# Altium PCB small_matrix_ws2812_LEDs.PcbDoc (part 2 of 2)
Units mm, origin at the board's own origin, x right, y up, seen from the top; angles counter-clockwise.
Board outline 51.05 x 59.31 mm, 2 copper layers (Top Layer, Bottom Layer); 129 components, 63 nets, 389 pads, 120 vias.
Unrouted connection lines stored in the file: 10.
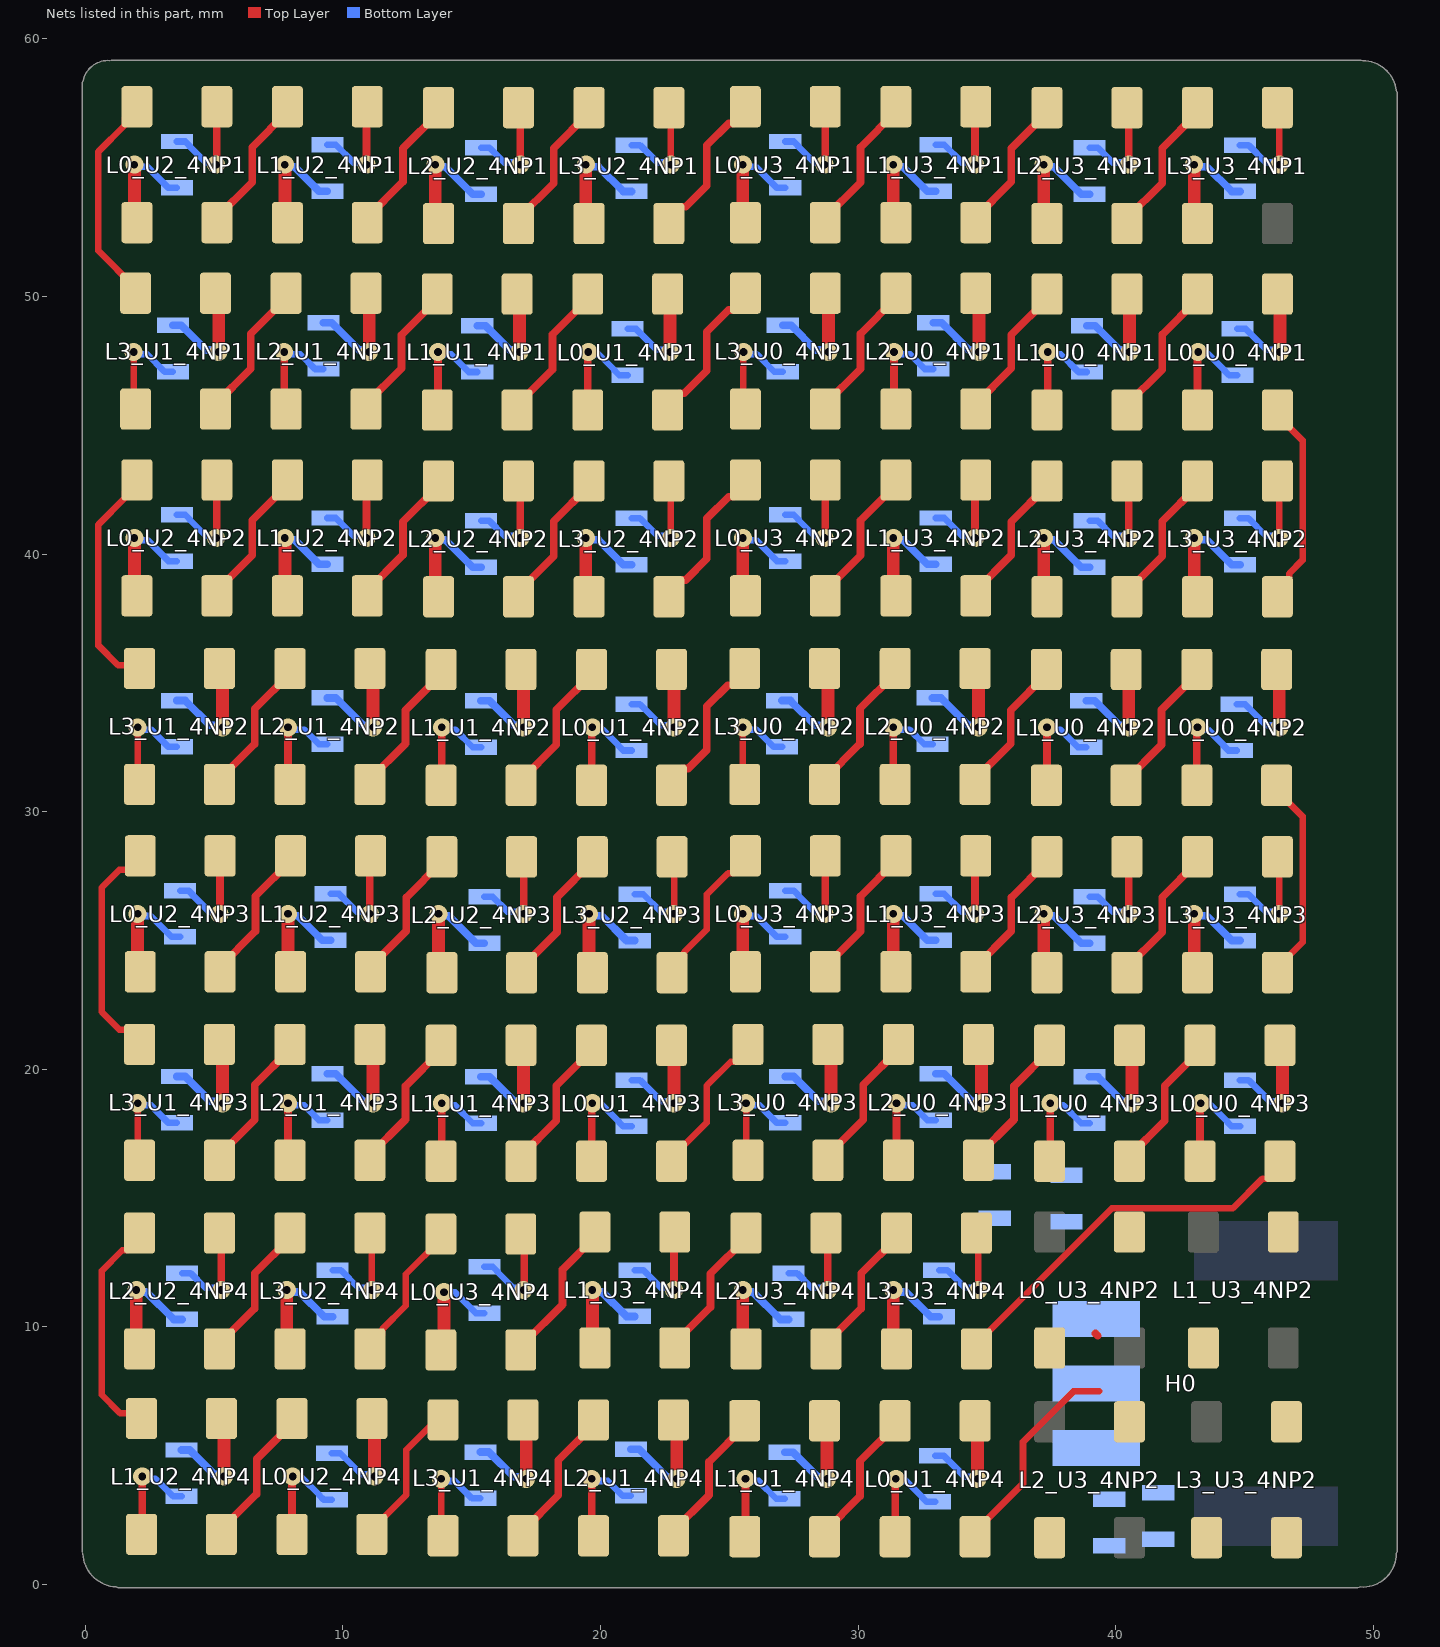
[diagram p2: the nets of this part, all layers, seen from the top]

## Via types
v1: diameter 0.7, hole 0.3, Top Layer to Bottom Layer, 120 vias

## Nets (pads, with @x,y where several pads share a name; then routed paths per layer and width w, separated by ;. In a path a pad name is that pad's centre, name@x,y a point inside that pad or via, vN(x,y) a via of type N, cw(c..) or ccw(c..) an arc to the next point about the centre after c; other vN are vias at no path point)
+5: C1_U0_4NP1.2 C1_U0_4NP2.2 C1_U0_4NP3.2 C1_U1_4NP1.2 C1_U1_4NP2.2 C1_U1_4NP3.2 C1_U1_4NP4.2 C1_U2_4NP1.2 C1_U2_4NP2.2 C1_U2_4NP3.2 C1_U2_4NP4.2 C1_U3_4NP1.2 C1_U3_4NP2.2 C1_U3_4NP3.2 C1_U3_4NP4.2 C2_U0_4NP1.2 C2_U0_4NP2.2 C2_U0_4NP3.2 C2_U1_4NP1.2 C2_U1_4NP2.2 C2_U1_4NP3.2 C2_U1_4NP4.2 C2_U2_4NP1.2 C2_U2_4NP2.2 C2_U2_4NP3.2 C2_U2_4NP4.2 C2_U3_4NP1.2 C2_U3_4NP2.2 C2_U3_4NP3.2 C2_U3_4NP4.2 C3_U0_4NP1.2 C3_U0_4NP2.2 C3_U0_4NP3.2 C3_U1_4NP1.2 C3_U1_4NP2.2 C3_U1_4NP3.2 C3_U1_4NP4.2 C3_U2_4NP1.2 C3_U2_4NP2.2 C3_U2_4NP3.2 C3_U2_4NP4.2 C3_U3_4NP1.2 C3_U3_4NP2.2 C3_U3_4NP3.2 C3_U3_4NP4.2 C4_U0_4NP1.2 C4_U0_4NP2.2 C4_U0_4NP3.2 C4_U1_4NP1.2 C4_U1_4NP2.2 C4_U1_4NP3.2 C4_U1_4NP4.2 C4_U2_4NP1.2 C4_U2_4NP2.2 C4_U2_4NP3.2 C4_U2_4NP4.2 C4_U3_4NP1.2 C4_U3_4NP2.2 C4_U3_4NP3.2 C4_U3_4NP4.2 H0.3 L0_U0_4NP1.1 L0_U0_4NP2.1 L0_U0_4NP3.1 L0_U1_4NP1.1 L0_U1_4NP2.1 L0_U1_4NP3.1 L0_U1_4NP4.1 L0_U2_4NP1.1 L0_U2_4NP2.1 L0_U2_4NP3.1 L0_U2_4NP4.1 L0_U3_4NP1.1 L0_U3_4NP2.1 L0_U3_4NP3.1 L0_U3_4NP4.1 L1_U0_4NP1.1 L1_U0_4NP2.1 L1_U0_4NP3.1 L1_U1_4NP1.1 L1_U1_4NP2.1 L1_U1_4NP3.1 L1_U1_4NP4.1 L1_U2_4NP1.1 L1_U2_4NP2.1 L1_U2_4NP3.1 L1_U2_4NP4.1 L1_U3_4NP1.1 L1_U3_4NP2.1 L1_U3_4NP3.1 L1_U3_4NP4.1 L2_U0_4NP1.1 L2_U0_4NP2.1 L2_U0_4NP3.1 L2_U1_4NP1.1 L2_U1_4NP2.1 L2_U1_4NP3.1 L2_U1_4NP4.1 L2_U2_4NP1.1 L2_U2_4NP2.1 L2_U2_4NP3.1 L2_U2_4NP4.1 L2_U3_4NP1.1 L2_U3_4NP2.1 L2_U3_4NP3.1 L2_U3_4NP4.1 L3_U0_4NP1.1 L3_U0_4NP2.1 L3_U0_4NP3.1 L3_U1_4NP1.1 L3_U1_4NP2.1 L3_U1_4NP3.1 L3_U1_4NP4.1 L3_U2_4NP1.1 L3_U2_4NP2.1 L3_U2_4NP3.1 L3_U2_4NP4.1 L3_U3_4NP1.1 L3_U3_4NP2.1 L3_U3_4NP3.1 L3_U3_4NP4.1 | length 266.9
  Top Layer w0.254: L0_U2_4NP2.1@1.905,38.48 L0_U2_4NP2.1@2.006,38.379 ; L0_U2_4NP1.1@1.905,52.969 L0_U2_4NP1.1@2.006,52.868 ; L2_U2_4NP4.1@1.98,9.271 L2_U2_4NP4.1@2.107,9.144 ; L0_U2_4NP3.1@2.032,23.886 L0_U2_4NP3.1@2.133,23.785 ; L3_U1_4NP1.1@5.054,50.129 L3_U1_4NP1.1@5.181,50.002 ; L3_U1_4NP3.1@5.207,20.966 L3_U1_4NP3.1@5.334,20.839 ; L3_U1_4NP2.1@5.207,35.56 L3_U1_4NP2.1@5.334,35.433 ; L1_U2_4NP4.1@5.285,6.441 L1_U2_4NP4.1@5.386,6.34 ; L1_U2_4NP2.1@7.747,38.48 L1_U2_4NP2.1@7.848,38.379 ; L1_U2_4NP1.1@7.747,52.969 L1_U2_4NP1.1@7.848,52.868 ; L3_U2_4NP4.1@7.822,9.271 L3_U2_4NP4.1@7.949,9.144 ; L1_U2_4NP3.1@7.874,23.886 L1_U2_4NP3.1@7.975,23.785 ; L2_U1_4NP1.1@10.896,50.129 L2_U1_4NP1.1@11.023,50.002 ; L2_U1_4NP3.1@11.049,20.966 L2_U1_4NP3.1@11.176,20.839 ; L2_U1_4NP2.1@11.049,35.56 L2_U1_4NP2.1@11.176,35.433 ; L0_U2_4NP4.1@11.127,6.441 L0_U2_4NP4.1@11.228,6.34 ; L2_U2_4NP2.1@13.589,38.47 L2_U2_4NP2.1@13.716,38.343 ; L2_U2_4NP1.1@13.589,52.959 L2_U2_4NP1.1@13.716,52.832 ; L2_U2_4NP3.1@13.716,23.876 L2_U2_4NP3.1@13.843,23.749 ; L1_U1_4NP1.1@16.764,50.093 L1_U1_4NP1.1@16.865,49.992 ; L1_U1_4NP3.1@16.917,20.93 L1_U1_4NP3.1@17.018,20.829 ; L1_U1_4NP2.1@16.917,35.524 L1_U1_4NP2.1@17.018,35.423 ; L3_U1_4NP4.1@16.992,6.386 L3_U1_4NP4.1@17.119,6.259 ; L3_U2_4NP2.1@19.431,38.47 L3_U2_4NP2.1@19.558,38.343 ; L3_U2_4NP1.1@19.431,52.959 L3_U2_4NP1.1@19.558,52.832 ; L3_U2_4NP3.1@19.558,23.876 L3_U2_4NP3.1@19.685,23.749 ; L1_U3_4NP4.1@19.685,9.281 L1_U3_4NP4.1@19.786,9.18 ; L0_U1_4NP1.1@22.606,50.093 L0_U1_4NP1.1@22.707,49.992 ; L0_U1_4NP3.1@22.759,20.93 L0_U1_4NP3.1@22.86,20.829 ; L0_U1_4NP2.1@22.759,35.524 L0_U1_4NP2.1@22.86,35.423 ; L2_U1_4NP4.1@22.834,6.386 L2_U1_4NP4.1@22.961,6.259 ; L2_U3_4NP4.1@25.527,9.271 L2_U3_4NP4.1@25.654,9.144 ; L0_U3_4NP3.1@25.527,23.886 L0_U3_4NP3.1@25.628,23.785 ; L0_U3_4NP2.1@25.527,38.48 L0_U3_4NP2.1@25.628,38.379 ; L0_U3_4NP1.1@25.527,52.969 L0_U3_4NP1.1@25.628,52.868 ; L1_U1_4NP4.1@28.702,6.35 L1_U1_4NP4.1@28.803,6.249 ; L3_U0_4NP2.1@28.702,35.56 L3_U0_4NP2.1@28.829,35.433 ; L3_U0_4NP1.1@28.728,50.129 L3_U0_4NP1.1@28.855,50.002 ; L3_U0_4NP3.1@28.829,20.966 L3_U0_4NP3.1@28.956,20.839 ; L3_U3_4NP4.1@31.369,9.271 L3_U3_4NP4.1@31.496,9.144 ; L1_U3_4NP3.1@31.369,23.886 L1_U3_4NP3.1@31.47,23.785 ; L1_U3_4NP2.1@31.369,38.48 L1_U3_4NP2.1@31.47,38.379 ; L1_U3_4NP1.1@31.369,52.969 L1_U3_4NP1.1@31.47,52.868 ; L0_U1_4NP4.1@34.544,6.35 L0_U1_4NP4.1@34.645,6.249 ; L2_U0_4NP2.1@34.544,35.56 L2_U0_4NP2.1@34.671,35.433 ; L2_U0_4NP1.1@34.57,50.129 L2_U0_4NP1.1@34.697,50.002 ; L2_U0_4NP3.1@34.671,20.966 L2_U0_4NP3.1@34.798,20.839 ; L2_U3_4NP3.1@37.211,23.876 L2_U3_4NP3.1@37.338,23.749 ; L2_U3_4NP2.1@37.211,38.47 L2_U3_4NP2.1@37.338,38.343 ; L2_U3_4NP1.1@37.211,52.959 L2_U3_4NP1.1@37.338,52.832 ; L1_U0_4NP2.1@40.412,35.524 L1_U0_4NP2.1@40.513,35.423 ; L1_U0_4NP1.1@40.438,50.093 L1_U0_4NP1.1@40.539,49.992 ; L1_U0_4NP3.1@40.539,20.93 L1_U0_4NP3.1@40.64,20.829 ; L3_U3_4NP3.1@43.053,23.876 L3_U3_4NP3.1@43.18,23.749 ; L3_U3_4NP2.1@43.053,38.47 L3_U3_4NP2.1@43.18,38.343 ; L3_U3_4NP1.1@43.053,52.959 L3_U3_4NP1.1@43.18,52.832 ; L0_U0_4NP2.1@46.254,35.524 L0_U0_4NP2.1@46.355,35.423 ; L0_U0_4NP1.1@46.28,50.093 L0_U0_4NP1.1@46.381,49.992 ; L0_U0_4NP3.1@46.381,20.93 L0_U0_4NP3.1@46.482,20.829
  Top Layer w0.3: 39.217,9.739 39.304,9.652
  Top Layer w0.5: L0_U2_4NP2.1@1.905,38.48 v1(1.905,40.629) ; L0_U2_4NP1.1@1.905,52.969 v1(1.905,55.118) ; L2_U2_4NP4.1@1.98,9.271 v1(1.98,11.43) ; L0_U2_4NP3.1@2.032,23.886 v1(2.032,26.035) ; v1(5.181,47.843) L3_U1_4NP1.1@5.181,50.002 ; v1(5.334,18.68) L3_U1_4NP3.1@5.334,20.839 ; v1(5.334,33.274) L3_U1_4NP2.1@5.334,35.433 ; v1(5.386,4.191) L1_U2_4NP4.1@5.386,6.34 ; L1_U2_4NP2.1@7.747,38.48 v1(7.747,40.629) ; L1_U2_4NP1.1@7.747,52.969 v1(7.747,55.118) ; L3_U2_4NP4.1@7.822,9.271 v1(7.822,11.43) ; L1_U2_4NP3.1@7.874,23.886 v1(7.874,26.035) ; v1(11.023,47.843) L2_U1_4NP1.1@11.023,50.002 ; v1(11.176,18.68) L2_U1_4NP3.1@11.176,20.839 ; v1(11.176,33.274) L2_U1_4NP2.1@11.176,35.433 ; v1(11.228,4.191) L0_U2_4NP4.1@11.228,6.34 ; L2_U2_4NP2.1@13.589,38.47 v1(13.589,40.629) ; L2_U2_4NP1.1@13.589,52.959 v1(13.589,55.118) ; L2_U2_4NP3.1@13.716,23.876 v1(13.716,26.035) ; L0_U3_4NP4.1@13.928,9.5 v1(13.928,11.345) ; v1(16.865,47.843) L1_U1_4NP1.1@16.865,49.992 ; v1(17.018,18.68) L1_U1_4NP3.1@17.018,20.829 ; v1(17.018,33.274) L1_U1_4NP2.1@17.018,35.423 ; v1(17.119,4.1) L3_U1_4NP4.1@17.119,6.259 ; L3_U2_4NP2.1@19.431,38.47 v1(19.431,40.629) ; L3_U2_4NP1.1@19.431,52.959 v1(19.431,55.118) ; L3_U2_4NP3.1@19.558,23.876 v1(19.558,26.035) ; L1_U3_4NP4.1@19.685,9.281 v1(19.685,11.43) ; v1(22.707,47.843) L0_U1_4NP1.1@22.707,49.992 ; v1(22.86,18.68) L0_U1_4NP3.1@22.86,20.829 ; v1(22.86,33.274) L0_U1_4NP2.1@22.86,35.423 ; v1(22.961,4.1) L2_U1_4NP4.1@22.961,6.259 ; L2_U3_4NP4.1@25.527,9.271 v1(25.527,11.43) ; L0_U3_4NP3.1@25.527,23.886 v1(25.527,26.035) ; L0_U3_4NP2.1@25.527,38.48 v1(25.527,40.629) ; L0_U3_4NP1.1@25.527,52.969 v1(25.527,55.118) ; v1(28.803,4.1) L1_U1_4NP4.1@28.803,6.249 ; v1(28.829,33.274) L3_U0_4NP2.1@28.829,35.433 ; v1(28.855,47.843) L3_U0_4NP1.1@28.855,50.002 ; v1(28.956,18.68) L3_U0_4NP3.1@28.956,20.839 ; L3_U3_4NP4.1@31.369,9.271 v1(31.369,11.43) ; L1_U3_4NP3.1@31.369,23.886 v1(31.369,26.035) ; L1_U3_4NP2.1@31.369,38.48 v1(31.369,40.629) ; L1_U3_4NP1.1@31.369,52.969 v1(31.369,55.118) ; v1(34.645,4.1) L0_U1_4NP4.1@34.645,6.249 ; v1(34.671,33.274) L2_U0_4NP2.1@34.671,35.433 ; v1(34.697,47.843) L2_U0_4NP1.1@34.697,50.002 ; v1(34.798,18.68) L2_U0_4NP3.1@34.798,20.839 ; L2_U3_4NP3.1@37.211,23.876 v1(37.211,26.035) ; L2_U3_4NP2.1@37.211,38.47 v1(37.211,40.629) ; L2_U3_4NP1.1@37.211,52.959 v1(37.211,55.118) ; v1(40.513,33.274) L1_U0_4NP2.1@40.513,35.423 ; v1(40.539,47.843) L1_U0_4NP1.1@40.539,49.992 ; v1(40.64,18.68) L1_U0_4NP3.1@40.64,20.829 ; L3_U3_4NP3.1@43.053,23.876 v1(43.053,26.035) ; L3_U3_4NP2.1@43.053,38.47 v1(43.053,40.629) ; L3_U3_4NP1.1@43.053,52.959 v1(43.053,55.118) ; v1(46.355,33.274) L0_U0_4NP2.1@46.355,35.423 ; v1(46.381,47.843) L0_U0_4NP1.1@46.381,49.992 ; v1(46.482,18.68) L0_U0_4NP3.1@46.482,20.829
  Bottom Layer w0.254: v1(1.905,40.629) 1.99,40.544 2.416,40.544 3.231,39.729 C1_U2_4NP2.2@3.556,39.729 ; v1(1.905,55.118) 1.99,55.033 2.416,55.033 3.231,54.218 C1_U2_4NP1.2@3.556,54.218 ; v1(2.032,26.035) 2.117,25.95 2.543,25.95 3.358,25.135 C1_U2_4NP3.2@3.683,25.135 ; C1_U2_4NP4.2@9.577,5.091 9.902,5.091 10.717,4.276 11.143,4.276 v1(11.228,4.191) ; v1(13.928,11.345) 14.354,11.345 15.169,10.53 C1_U3_4NP4.2@15.494,10.53 ; C1_U1_4NP1.2@21.056,48.743 21.381,48.743 22.196,47.928 22.622,47.928 v1(22.707,47.843) ; C1_U1_4NP3.2@21.209,19.58 21.534,19.58 22.349,18.765 22.775,18.765 v1(22.86,18.68) ; C1_U1_4NP2.2@21.209,34.174 21.534,34.174 22.349,33.359 22.775,33.359 v1(22.86,33.274) ; v1(25.527,26.035) 25.612,25.95 26.038,25.95 26.853,25.135 C1_U3_4NP3.2@27.178,25.135 ; v1(25.527,40.629) 25.612,40.544 26.038,40.544 26.853,39.729 C1_U3_4NP2.2@27.178,39.729 ; v1(25.527,55.118) 25.612,55.033 26.038,55.033 26.853,54.218 C1_U3_4NP1.2@27.178,54.218 ; C1_U1_4NP4.2@32.994,5 33.319,5 34.134,4.185 34.56,4.185 v1(34.645,4.1) ; C1_U0_4NP2.2@44.704,34.174 45.029,34.174 45.844,33.359 46.27,33.359 v1(46.355,33.274) ; C1_U0_4NP1.2@44.73,48.743 45.055,48.743 45.87,47.928 46.296,47.928 v1(46.381,47.843) ; C1_U0_4NP3.2@44.831,19.58 45.156,19.58 45.971,18.765 46.397,18.765 v1(46.482,18.68)
  Bottom Layer w0.3: v1(1.98,11.43) 2.057,11.353 2.367,11.353 3.433,10.287 C3_U2_4NP4.2@3.758,10.287 ; C4_U1_4NP1.2@3.403,48.881 3.728,48.881 4.689,47.92 5.104,47.92 v1(5.181,47.843) ; C4_U1_4NP3.2@3.556,19.718 3.881,19.718 4.842,18.757 5.257,18.757 v1(5.334,18.68) ; C4_U1_4NP2.2@3.556,34.312 3.881,34.312 4.842,33.351 5.257,33.351 v1(5.334,33.274) ; C2_U2_4NP4.2@3.735,5.218 4.06,5.218 5.01,4.268 5.309,4.268 v1(5.386,4.191) ; v1(7.747,40.629) 7.824,40.552 8.123,40.552 9.073,39.602 C2_U2_4NP2.2@9.398,39.602 ; v1(7.747,55.118) 7.824,55.041 8.123,55.041 9.073,54.091 C2_U2_4NP1.2@9.398,54.091 ; v1(7.822,11.43) 7.899,11.353 8.314,11.353 9.275,10.392 C4_U2_4NP4.2@9.6,10.392 ; v1(7.874,26.035) 7.951,25.958 8.25,25.958 9.2,25.008 C2_U2_4NP3.2@9.525,25.008 ; C3_U1_4NP1.2@9.245,48.986 9.57,48.986 10.636,47.92 10.946,47.92 v1(11.023,47.843) ; C3_U1_4NP3.2@9.398,19.823 9.723,19.823 10.789,18.757 11.099,18.757 v1(11.176,18.68) ; C3_U1_4NP2.2@9.398,34.417 9.723,34.417 10.789,33.351 11.099,33.351 v1(11.176,33.274) ; v1(13.589,40.629) 13.666,40.552 13.976,40.552 15.042,39.486 C3_U2_4NP2.2@15.367,39.486 ; v1(13.589,55.118) 13.666,55.041 13.976,55.041 15.042,53.975 C3_U2_4NP1.2@15.367,53.975 ; v1(13.716,26.035) 13.793,25.958 14.103,25.958 15.169,24.892 C3_U2_4NP3.2@15.494,24.892 ; C2_U1_4NP1.2@15.214,48.87 15.539,48.87 16.489,47.92 16.788,47.92 v1(16.865,47.843) ; C4_U1_4NP4.2@15.341,5.138 15.666,5.138 16.627,4.177 17.042,4.177 v1(17.119,4.1) ; C2_U1_4NP3.2@15.367,19.707 15.692,19.707 16.642,18.757 16.941,18.757 v1(17.018,18.68) ; C2_U1_4NP2.2@15.367,34.301 15.692,34.301 16.642,33.351 16.941,33.351 v1(17.018,33.274) ; v1(19.431,40.629) 19.508,40.552 19.923,40.552 20.884,39.591 C4_U2_4NP2.2@21.209,39.591 ; v1(19.431,55.118) 19.508,55.041 19.923,55.041 20.884,54.08 C4_U2_4NP1.2@21.209,54.08 ; v1(19.558,26.035) 19.635,25.958 20.05,25.958 21.011,24.997 C4_U2_4NP3.2@21.336,24.997 ; v1(19.685,11.43) 19.762,11.353 20.061,11.353 21.011,10.403 C2_U3_4NP4.2@21.336,10.403 ; C3_U1_4NP4.2@21.183,5.243 21.508,5.243 22.574,4.177 22.884,4.177 v1(22.961,4.1) ; v1(25.527,11.43) 25.604,11.353 25.914,11.353 26.98,10.287 C3_U3_4NP4.2@27.305,10.287 ; C4_U0_4NP2.2@27.051,34.312 27.376,34.312 28.337,33.351 28.752,33.351 v1(28.829,33.274) ; C4_U0_4NP1.2@27.077,48.881 27.402,48.881 28.363,47.92 28.778,47.92 v1(28.855,47.843) ; C2_U1_4NP4.2@27.152,5.127 27.477,5.127 28.427,4.177 28.726,4.177 v1(28.803,4.1) ; C4_U0_4NP3.2@27.178,19.718 27.503,19.718 28.464,18.757 28.879,18.757 v1(28.956,18.68) ; v1(31.369,11.43) 31.446,11.353 31.861,11.353 32.822,10.392 C4_U3_4NP4.2@33.147,10.392 ; v1(31.369,26.035) 31.446,25.958 31.745,25.958 32.695,25.008 C2_U3_4NP3.2@33.02,25.008 ; v1(31.369,40.629) 31.446,40.552 31.745,40.552 32.695,39.602 C2_U3_4NP2.2@33.02,39.602 ; v1(31.369,55.118) 31.446,55.041 31.745,55.041 32.695,54.091 C2_U3_4NP1.2@33.02,54.091 ; C3_U0_4NP2.2@32.893,34.417 33.218,34.417 34.284,33.351 34.594,33.351 v1(34.671,33.274) ; C3_U0_4NP1.2@32.919,48.986 33.244,48.986 34.31,47.92 34.62,47.92 v1(34.697,47.843) ; C3_U0_4NP3.2@33.02,19.823 33.345,19.823 34.411,18.757 34.721,18.757 v1(34.798,18.68) ; v1(37.211,26.035) 37.288,25.958 37.598,25.958 38.664,24.892 C3_U3_4NP3.2@38.989,24.892 ; v1(37.211,40.629) 37.288,40.552 37.598,40.552 38.664,39.486 C3_U3_4NP2.2@38.989,39.486 ; v1(37.211,55.118) 37.288,55.041 37.598,55.041 38.664,53.975 C3_U3_4NP1.2@38.989,53.975 ; C2_U0_4NP2.2@38.862,34.301 39.187,34.301 40.137,33.351 40.436,33.351 v1(40.513,33.274) ; C2_U0_4NP1.2@38.888,48.87 39.213,48.87 40.163,47.92 40.462,47.92 v1(40.539,47.843) ; C2_U0_4NP3.2@38.989,19.707 39.314,19.707 40.264,18.757 40.563,18.757 v1(40.64,18.68) ; v1(43.053,26.035) 43.13,25.958 43.545,25.958 44.506,24.997 C4_U3_4NP3.2@44.831,24.997 ; v1(43.053,40.629) 43.13,40.552 43.545,40.552 44.506,39.591 C4_U3_4NP2.2@44.831,39.591 ; v1(43.053,55.118) 43.13,55.041 43.545,55.041 44.506,54.08 C4_U3_4NP1.2@44.831,54.08
DIN_TOP: H0.2 L0_U1_4NP4.4 | length 8.2
  Top Layer w0.254: L0_U1_4NP4.4@34.544,1.85 34.544,2.05 36.406,3.912 36.406,5.532 38.367,7.493 39.37,7.493
GND: C1_U0_4NP1.1 C1_U0_4NP2.1 C1_U0_4NP3.1 C1_U1_4NP1.1 C1_U1_4NP2.1 C1_U1_4NP3.1 C1_U1_4NP4.1 C1_U2_4NP1.1 C1_U2_4NP2.1 C1_U2_4NP3.1 C1_U2_4NP4.1 C1_U3_4NP1.1 C1_U3_4NP2.1 C1_U3_4NP3.1 C1_U3_4NP4.1 C2_U0_4NP1.1 C2_U0_4NP2.1 C2_U0_4NP3.1 C2_U1_4NP1.1 C2_U1_4NP2.1 C2_U1_4NP3.1 C2_U1_4NP4.1 C2_U2_4NP1.1 C2_U2_4NP2.1 C2_U2_4NP3.1 C2_U2_4NP4.1 C2_U3_4NP1.1 C2_U3_4NP2.1 C2_U3_4NP3.1 C2_U3_4NP4.1 C3_U0_4NP1.1 C3_U0_4NP2.1 C3_U0_4NP3.1 C3_U1_4NP1.1 C3_U1_4NP2.1 C3_U1_4NP3.1 C3_U1_4NP4.1 C3_U2_4NP1.1 C3_U2_4NP2.1 C3_U2_4NP3.1 C3_U2_4NP4.1 C3_U3_4NP1.1 C3_U3_4NP2.1 C3_U3_4NP3.1 C3_U3_4NP4.1 C4_U0_4NP1.1 C4_U0_4NP2.1 C4_U0_4NP3.1 C4_U1_4NP1.1 C4_U1_4NP2.1 C4_U1_4NP3.1 C4_U1_4NP4.1 C4_U2_4NP1.1 C4_U2_4NP2.1 C4_U2_4NP3.1 C4_U2_4NP4.1 C4_U3_4NP1.1 C4_U3_4NP2.1 C4_U3_4NP3.1 C4_U3_4NP4.1 H0.1 L0_U0_4NP1.3 L0_U0_4NP2.3 L0_U0_4NP3.3 L0_U1_4NP1.3 L0_U1_4NP2.3 L0_U1_4NP3.3 L0_U1_4NP4.3 L0_U2_4NP1.3 L0_U2_4NP2.3 L0_U2_4NP3.3 L0_U2_4NP4.3 L0_U3_4NP1.3 L0_U3_4NP2.3 L0_U3_4NP3.3 L0_U3_4NP4.3 L1_U0_4NP1.3 L1_U0_4NP2.3 L1_U0_4NP3.3 L1_U1_4NP1.3 L1_U1_4NP2.3 L1_U1_4NP3.3 L1_U1_4NP4.3 L1_U2_4NP1.3 L1_U2_4NP2.3 L1_U2_4NP3.3 L1_U2_4NP4.3 L1_U3_4NP1.3 L1_U3_4NP2.3 L1_U3_4NP3.3 L1_U3_4NP4.3 L2_U0_4NP1.3 L2_U0_4NP2.3 L2_U0_4NP3.3 L2_U1_4NP1.3 L2_U1_4NP2.3 L2_U1_4NP3.3 L2_U1_4NP4.3 L2_U2_4NP1.3 L2_U2_4NP2.3 L2_U2_4NP3.3 L2_U2_4NP4.3 L2_U3_4NP1.3 L2_U3_4NP2.3 L2_U3_4NP3.3 L2_U3_4NP4.3 L3_U0_4NP1.3 L3_U0_4NP2.3 L3_U0_4NP3.3 L3_U1_4NP1.3 L3_U1_4NP2.3 L3_U1_4NP3.3 L3_U1_4NP4.3 L3_U2_4NP1.3 L3_U2_4NP2.3 L3_U2_4NP3.3 L3_U2_4NP4.3 L3_U3_4NP1.3 L3_U3_4NP2.3 L3_U3_4NP3.3 L3_U3_4NP4.3 | length 245.5
  Top Layer w0.254: v1(1.879,47.843) 1.879,45.704 L3_U1_4NP1.3@1.954,45.629 ; v1(2.032,18.68) 2.032,16.541 L3_U1_4NP3.3@2.107,16.466 ; v1(2.032,33.274) 2.032,31.135 L3_U1_4NP2.3@2.107,31.06 ; L1_U2_4NP4.3@2.185,1.941 L1_U2_4NP4.3@2.211,1.967 ; L2_U2_4NP4.3@5.207,13.644 L2_U2_4NP4.3@5.282,13.569 ; L2_U1_4NP1.3@7.721,45.704 L2_U1_4NP1.3@7.796,45.629 ; L2_U1_4NP3.3@7.874,16.541 L2_U1_4NP3.3@7.949,16.466 ; L2_U1_4NP2.3@7.874,31.135 L2_U1_4NP2.3@7.949,31.06 ; L1_U2_4NP2.3@10.922,42.853 L1_U2_4NP2.3@10.948,42.879 ; L1_U2_4NP1.3@10.922,57.342 L1_U2_4NP1.3@10.948,57.368 ; L3_U2_4NP4.3@11.049,13.644 11.124,13.569 v1(11.124,11.43) ; L1_U2_4NP3.3@11.049,28.259 L1_U2_4NP3.3@11.075,28.285 ; L1_U1_4NP1.3@13.664,45.593 L1_U1_4NP1.3@13.69,45.619 ; v1(13.817,4.1) 13.817,1.961 L3_U1_4NP4.3@13.892,1.886 ; L1_U1_4NP3.3@13.817,16.43 L1_U1_4NP3.3@13.843,16.456 ; L1_U1_4NP2.3@13.817,31.024 L1_U1_4NP2.3@13.843,31.05 ; L2_U2_4NP2.3@16.816,42.843 L2_U2_4NP2.3@16.891,42.768 ; L2_U2_4NP1.3@16.816,57.332 L2_U2_4NP1.3@16.891,57.257 ; L2_U2_4NP3.3@16.943,28.249 L2_U2_4NP3.3@17.018,28.174 ; L2_U1_4NP4.3@19.659,1.961 L2_U1_4NP4.3@19.734,1.886 ; L3_U2_4NP2.3@22.658,42.843 22.733,42.768 v1(22.733,40.629) ; L3_U2_4NP1.3@22.658,57.332 22.733,57.257 v1(22.733,55.118) ; L3_U2_4NP3.3@22.785,28.249 22.86,28.174 v1(22.86,26.035) ; L1_U3_4NP4.3@22.86,13.654 L1_U3_4NP4.3@22.886,13.68 ; v1(25.527,33.274) 25.527,31.135 L3_U0_4NP2.3@25.602,31.06 ; v1(25.553,47.843) 25.553,45.704 L3_U0_4NP1.3@25.628,45.629 ; L1_U1_4NP4.3@25.602,1.85 L1_U1_4NP4.3@25.628,1.876 ; v1(25.654,18.68) 25.654,16.541 L3_U0_4NP3.3@25.729,16.466 ; L2_U3_4NP4.3@28.754,13.644 L2_U3_4NP4.3@28.829,13.569 ; L2_U0_4NP2.3@31.369,31.135 L2_U0_4NP2.3@31.444,31.06 ; L2_U0_4NP1.3@31.395,45.704 L2_U0_4NP1.3@31.47,45.629 ; L2_U0_4NP3.3@31.496,16.541 L2_U0_4NP3.3@31.571,16.466 ; L1_U3_4NP3.3@34.544,28.259 L1_U3_4NP3.3@34.57,28.285 ; L1_U3_4NP2.3@34.544,42.853 L1_U3_4NP2.3@34.57,42.879 ; L1_U3_4NP1.3@34.544,57.342 L1_U3_4NP1.3@34.57,57.368 ; L3_U3_4NP4.3@34.596,13.644 34.671,13.569 v1(34.671,11.43) ; L1_U0_4NP2.3@37.312,31.024 L1_U0_4NP2.3@37.338,31.05 ; L1_U0_4NP1.3@37.338,45.593 L1_U0_4NP1.3@37.364,45.619 ; L1_U0_4NP3.3@37.439,16.43 L1_U0_4NP3.3@37.465,16.456 ; L2_U3_4NP3.3@40.438,28.249 L2_U3_4NP3.3@40.513,28.174 ; L2_U3_4NP2.3@40.438,42.843 L2_U3_4NP2.3@40.513,42.768 ; L2_U3_4NP1.3@40.438,57.332 L2_U3_4NP1.3@40.513,57.257 ; L3_U3_4NP3.3@46.28,28.249 46.355,28.174 v1(46.355,26.035) ; L3_U3_4NP2.3@46.28,42.843 46.355,42.768 v1(46.355,40.629) ; L3_U3_4NP1.3@46.28,57.332 46.355,57.257 v1(46.355,55.118)
  Top Layer w0.3: L1_U2_4NP4.3@2.211,1.967 v1(2.211,4.191) ; v1@5.106,40.655 L0_U2_4NP2.3@5.106,42.879 ; v1@5.106,55.144 L0_U2_4NP1.3@5.106,57.368 ; v1@5.233,26.061 L0_U2_4NP3.3@5.233,28.285 ; v1(5.282,11.43) L2_U2_4NP4.3@5.282,13.569 ; L2_U1_4NP1.3@7.721,45.704 v1(7.721,47.843) ; L2_U1_4NP3.3@7.874,16.541 v1(7.874,18.68) ; L2_U1_4NP2.3@7.874,31.135 v1(7.874,33.274) ; L0_U2_4NP4.3@8.027,1.941 v1@8.027,4.165 ; v1(10.922,40.629) L1_U2_4NP2.3@10.922,42.853 ; v1(10.922,55.118) L1_U2_4NP1.3@10.922,57.342 ; v1(11.049,26.035) L1_U2_4NP3.3@11.049,28.259 ; L1_U1_4NP1.3@13.69,45.619 v1(13.69,47.843) ; L1_U1_4NP3.3@13.843,16.456 v1(13.843,18.68) ; L1_U1_4NP2.3@13.843,31.05 v1(13.843,33.274) ; v1(16.891,40.629) L2_U2_4NP2.3@16.891,42.768 ; v1(16.891,55.118) L2_U2_4NP1.3@16.891,57.257 ; v1(17.018,26.035) L2_U2_4NP3.3@17.018,28.174 ; v1@17.044,11.456 L0_U3_4NP4.3@17.044,13.68 ; L0_U1_4NP1.3@19.506,45.593 v1@19.506,47.817 ; L2_U1_4NP4.3@19.659,1.961 v1(19.659,4.1) ; L0_U1_4NP3.3@19.659,16.43 v1@19.659,18.654 ; L0_U1_4NP2.3@19.659,31.024 v1@19.659,33.248 ; v1(22.86,11.43) L1_U3_4NP4.3@22.86,13.654 ; L1_U1_4NP4.3@25.628,1.876 v1(25.628,4.1) ; v1@28.728,26.061 L0_U3_4NP3.3@28.728,28.285 ; v1@28.728,40.655 L0_U3_4NP2.3@28.728,42.879 ; v1@28.728,55.144 L0_U3_4NP1.3@28.728,57.368 ; v1(28.829,11.43) L2_U3_4NP4.3@28.829,13.569 ; L2_U0_4NP2.3@31.369,31.135 v1(31.369,33.274) ; L2_U0_4NP1.3@31.395,45.704 v1(31.395,47.843) ; L0_U1_4NP4.3@31.444,1.85 v1@31.444,4.074 ; L2_U0_4NP3.3@31.496,16.541 v1(31.496,18.68) ; v1(34.544,26.035) L1_U3_4NP3.3@34.544,28.259 ; v1(34.544,40.629) L1_U3_4NP2.3@34.544,42.853 ; v1(34.544,55.118) L1_U3_4NP1.3@34.544,57.342 ; L1_U0_4NP2.3@37.338,31.05 v1(37.338,33.274) ; L1_U0_4NP1.3@37.364,45.619 v1(37.364,47.843) ; L1_U0_4NP3.3@37.465,16.456 v1(37.465,18.68) ; v1(40.513,26.035) L2_U3_4NP3.3@40.513,28.174 ; v1(40.513,40.629) L2_U3_4NP2.3@40.513,42.768 ; v1(40.513,55.118) L2_U3_4NP1.3@40.513,57.257 ; L0_U0_4NP2.3@43.154,31.024 v1@43.154,33.248 ; L0_U0_4NP1.3@43.18,45.593 v1@43.18,47.817 ; L0_U0_4NP3.3@43.281,16.43 v1@43.281,18.654
  Bottom Layer w0.254: v1(1.879,47.843) 1.964,47.758 2.401,47.758 3.078,47.081 C4_U1_4NP1.1@3.403,47.081 ; v1(2.032,18.68) 2.117,18.595 2.554,18.595 3.231,17.918 C4_U1_4NP3.1@3.556,17.918 ; v1(2.032,33.274) 2.117,33.189 2.554,33.189 3.231,32.512 C4_U1_4NP2.1@3.556,32.512 ; v1(2.211,4.191) 2.296,4.106 2.722,4.106 3.41,3.418 C2_U2_4NP4.1@3.735,3.418 ; C1_U2_4NP2.1@3.556,41.529 3.881,41.529 4.054,41.356 4.054,41.336 4.676,40.714 4.995,40.714 v1(5.08,40.629) ; C1_U2_4NP1.1@3.556,56.018 3.881,56.018 4.054,55.845 4.054,55.825 4.676,55.203 4.995,55.203 v1(5.08,55.118) ; C1_U2_4NP3.1@3.683,26.935 4.008,26.935 4.181,26.762 4.181,26.742 4.803,26.12 5.122,26.12 v1(5.207,26.035) ; C3_U2_4NP4.1@3.758,12.087 4.083,12.087 4.655,11.515 5.197,11.515 v1(5.282,11.43) ; v1(7.721,47.843) 7.806,47.758 8.348,47.758 8.92,47.186 C3_U1_4NP1.1@9.245,47.186 ; v1(7.874,18.68) 7.959,18.595 8.501,18.595 9.073,18.023 C3_U1_4NP3.1@9.398,18.023 ; v1(7.874,33.274) 7.959,33.189 8.501,33.189 9.073,32.617 C3_U1_4NP2.1@9.398,32.617 ; v1(8.053,4.191) 8.138,4.106 8.457,4.106 9.079,3.484 9.079,3.464 9.252,3.291 C1_U2_4NP4.1@9.577,3.291 ; C2_U2_4NP2.1@9.398,41.402 9.723,41.402 10.411,40.714 10.837,40.714 v1(10.922,40.629) ; C2_U2_4NP1.1@9.398,55.891 9.723,55.891 10.411,55.203 10.837,55.203 v1(10.922,55.118) ; C2_U2_4NP3.1@9.525,26.808 9.85,26.808 10.538,26.12 10.964,26.12 v1(11.049,26.035) ; C4_U2_4NP4.1@9.6,12.192 9.925,12.192 10.602,11.515 11.039,11.515 v1(11.124,11.43) ; v1(13.69,47.843) 13.775,47.758 14.201,47.758 14.889,47.07 C2_U1_4NP1.1@15.214,47.07 ; v1(13.817,4.1) 13.902,4.015 14.339,4.015 15.016,3.338 C4_U1_4NP4.1@15.341,3.338 ; v1(13.843,18.68) 13.928,18.595 14.354,18.595 15.042,17.907 C2_U1_4NP3.1@15.367,17.907 ; v1(13.843,33.274) 13.928,33.189 14.354,33.189 15.042,32.501 C2_U1_4NP2.1@15.367,32.501 ; C3_U2_4NP2.1@15.367,41.286 15.692,41.286 16.264,40.714 16.806,40.714 v1(16.891,40.629) ; C3_U2_4NP1.1@15.367,55.775 15.692,55.775 16.264,55.203 16.806,55.203 v1(16.891,55.118) ; C1_U3_4NP4.1@15.494,12.33 15.819,12.33 15.992,12.157 15.992,12.137 16.614,11.515 16.933,11.515 v1(17.018,11.43) ; C3_U2_4NP3.1@15.494,26.692 15.819,26.692 16.391,26.12 16.933,26.12 v1(17.018,26.035) ; v1(19.532,47.843) 19.617,47.758 19.936,47.758 20.558,47.136 20.558,47.116 20.731,46.943 C1_U1_4NP1.1@21.056,46.943 ; v1(19.659,4.1) 19.744,4.015 20.286,4.015 20.858,3.443 C3_U1_4NP4.1@21.183,3.443 ; v1(19.685,18.68) 19.77,18.595 20.089,18.595 20.711,17.973 20.711,17.953 20.884,17.78 C1_U1_4NP3.1@21.209,17.78 ; v1(19.685,33.274) 19.77,33.189 20.089,33.189 20.711,32.567 20.711,32.547 20.884,32.374 C1_U1_4NP2.1@21.209,32.374 ; C4_U2_4NP2.1@21.209,41.391 21.534,41.391 22.211,40.714 22.648,40.714 v1(22.733,40.629) ; C4_U2_4NP1.1@21.209,55.88 21.534,55.88 22.211,55.203 22.648,55.203 v1(22.733,55.118) ; C2_U3_4NP4.1@21.336,12.203 21.661,12.203 22.349,11.515 22.775,11.515 v1(22.86,11.43) ; C4_U2_4NP3.1@21.336,26.797 21.661,26.797 22.338,26.12 22.775,26.12 v1(22.86,26.035) ; v1(25.527,33.274) 25.612,33.189 26.049,33.189 26.726,32.512 C4_U0_4NP2.1@27.051,32.512 ; v1(25.553,47.843) 25.638,47.758 26.075,47.758 26.752,47.081 C4_U0_4NP1.1@27.077,47.081 ; v1(25.628,4.1) 25.713,4.015 26.139,4.015 26.827,3.327 C2_U1_4NP4.1@27.152,3.327 ; v1(25.654,18.68) 25.739,18.595 26.176,18.595 26.853,17.918 C4_U0_4NP3.1@27.178,17.918 ; C1_U3_4NP3.1@27.178,26.935 27.503,26.935 27.676,26.762 27.676,26.742 28.298,26.12 28.617,26.12 v1(28.702,26.035) ; C1_U3_4NP2.1@27.178,41.529 27.503,41.529 27.676,41.356 27.676,41.336 28.298,40.714 28.617,40.714 v1(28.702,40.629) ; C1_U3_4NP1.1@27.178,56.018 27.503,56.018 27.676,55.845 27.676,55.825 28.298,55.203 28.617,55.203 v1(28.702,55.118) ; C3_U3_4NP4.1@27.305,12.087 27.63,12.087 28.202,11.515 28.744,11.515 v1(28.829,11.43) ; v1(31.369,33.274) 31.454,33.189 31.996,33.189 32.568,32.617 C3_U0_4NP2.1@32.893,32.617 ; v1(31.395,47.843) 31.48,47.758 32.022,47.758 32.594,47.186 C3_U0_4NP1.1@32.919,47.186 ; v1(31.47,4.1) 31.555,4.015 31.874,4.015 32.496,3.393 32.496,3.373 32.669,3.2 C1_U1_4NP4.1@32.994,3.2 ; v1(31.496,18.68) 31.581,18.595 32.123,18.595 32.695,18.023 C3_U0_4NP3.1@33.02,18.023 ; C2_U3_4NP3.1@33.02,26.808 33.345,26.808 34.033,26.12 34.459,26.12 v1(34.544,26.035) ; C2_U3_4NP2.1@33.02,41.402 33.345,41.402 34.033,40.714 34.459,40.714 v1(34.544,40.629) ; C2_U3_4NP1.1@33.02,55.891 33.345,55.891 34.033,55.203 34.459,55.203 v1(34.544,55.118) ; C4_U3_4NP4.1@33.147,12.192 33.472,12.192 34.149,11.515 34.586,11.515 v1(34.671,11.43) ; v1(37.338,33.274) 37.423,33.189 37.849,33.189 38.537,32.501 C2_U0_4NP2.1@38.862,32.501 ; v1(37.364,47.843) 37.449,47.758 37.875,47.758 38.563,47.07 C2_U0_4NP1.1@38.888,47.07 ; v1(37.465,18.68) 37.55,18.595 37.976,18.595 38.664,17.907 C2_U0_4NP3.1@38.989,17.907 ; C3_U3_4NP3.1@38.989,26.692 39.314,26.692 39.886,26.12 40.428,26.12 v1(40.513,26.035) ; C3_U3_4NP2.1@38.989,41.286 39.314,41.286 39.886,40.714 40.428,40.714 v1(40.513,40.629) ; C3_U3_4NP1.1@38.989,55.775 39.314,55.775 39.886,55.203 40.428,55.203 v1(40.513,55.118) ; v1(43.18,33.274) 43.265,33.189 43.584,33.189 44.206,32.567 44.206,32.547 44.379,32.374 C1_U0_4NP2.1@44.704,32.374 ; v1(43.206,47.843) 43.291,47.758 43.61,47.758 44.232,47.136 44.232,47.116 44.405,46.943 C1_U0_4NP1.1@44.73,46.943 ; v1(43.307,18.68) 43.392,18.595 43.711,18.595 44.333,17.973 44.333,17.953 44.506,17.78 C1_U0_4NP3.1@44.831,17.78 ; C4_U3_4NP3.1@44.831,26.797 45.156,26.797 45.833,26.12 46.27,26.12 v1(46.355,26.035) ; C4_U3_4NP2.1@44.831,41.391 45.156,41.391 45.833,40.714 46.27,40.714 v1(46.355,40.629) ; C4_U3_4NP1.1@44.831,55.88 45.156,55.88 45.833,55.203 46.27,55.203 v1(46.355,55.118)
NetL0_U0_4NP1_2: L0_U0_4NP1.2 L1_U0_4NP1.4 | length 5.6
  Top Layer w0.3: L1_U0_4NP1.4@40.438,45.593 40.438,45.793 41.809,47.164 41.809,48.522 43.18,49.893 L0_U0_4NP1.2@43.18,50.093
NetL0_U0_4NP1_4: L0_U0_4NP1.4 L3_U3_4NP2.2@46.28,38.343 | length 8.1
  Top Layer w0.254: L3_U3_4NP2.2@46.28,38.343 46.738,38.801 46.738,39.245 47.261,39.768 47.261,44.412 46.28,45.393 L0_U0_4NP1.4@46.28,45.593
NetL0_U0_4NP2_2: L0_U0_4NP2.2 L1_U0_4NP2.4 | length 5.6
  Top Layer w0.3: L1_U0_4NP2.4@40.412,31.024 40.412,31.224 41.783,32.595 41.783,33.953 43.154,35.324 L0_U0_4NP2.2@43.154,35.524
NetL0_U0_4NP2_4: L0_U0_4NP2.4 L3_U3_4NP3.2 | length 8.1
  Top Layer w0.254: L0_U0_4NP2.4@46.254,31.024 46.254,30.824 47.261,29.817 47.261,24.93 46.28,23.949 L3_U3_4NP3.2@46.28,23.749
NetL0_U0_4NP3_2: L0_U0_4NP3.2 L1_U0_4NP3.4 | length 5.6
  Top Layer w0.3: L1_U0_4NP3.4@40.539,16.43 40.539,16.63 41.91,18.001 41.91,19.359 43.281,20.73 L0_U0_4NP3.2@43.281,20.93
NetL0_U0_4NP3_4: L0_U0_4NP3.4 L3_U3_4NP4.2 | length 15
  Top Layer w0.254: L3_U3_4NP4.2@34.596,9.144 34.596,9.344 39.857,14.605 44.556,14.605 45.708,15.757 45.908,15.757 46.381,16.23 L0_U0_4NP3.4@46.381,16.43
NetL0_U1_4NP1_2: L0_U1_4NP1.2 L1_U1_4NP1.4 | length 5.6
  Top Layer w0.3: L1_U1_4NP1.4@16.764,45.593 16.764,45.793 18.135,47.164 18.135,48.522 19.506,49.893 L0_U1_4NP1.2@19.506,50.093
NetL0_U1_4NP1_4: L0_U1_4NP1.4 L3_U0_4NP1.2 | length 6
  Top Layer w0.3: L0_U1_4NP1.4@22.606,45.593 22.606,45.793 23.056,46.243 23.256,46.243 24.13,47.117 24.13,48.631 24.978,49.479 25.178,49.479 25.628,49.929 L3_U0_4NP1.2@25.628,50.129
NetL0_U1_4NP2_2: L0_U1_4NP2.2 L1_U1_4NP2.4 | length 5.6
  Top Layer w0.3: L1_U1_4NP2.4@16.917,31.024 16.917,31.224 18.288,32.595 18.288,33.953 19.659,35.324 L0_U1_4NP2.2@19.659,35.524
NetL0_U1_4NP2_4: L0_U1_4NP2.4 L3_U0_4NP2.2 | length 5.9
  Top Layer w0.3: L0_U1_4NP2.4@22.759,31.024 22.759,31.224 23.209,31.674 23.409,31.674 24.13,32.395 24.13,34.088 24.952,34.91 25.152,34.91 25.602,35.36 L3_U0_4NP2.2@25.602,35.56
NetL0_U1_4NP3_2: L0_U1_4NP3.2 L1_U1_4NP3.4 | length 5.6
  Top Layer w0.3: L1_U1_4NP3.4@16.917,16.43 16.917,16.63 18.288,18.001 18.288,19.359 19.659,20.73 L0_U1_4NP3.2@19.659,20.93
NetL0_U1_4NP3_4: L0_U1_4NP3.4 L3_U0_4NP3.2 | length 6
  Top Layer w0.254: L0_U1_4NP3.4@22.759,16.357 22.759,16.63 23.232,17.103 23.305,17.103 24.13,17.928 24.13,19.367 25.056,20.293 25.256,20.293 25.729,20.766 L3_U0_4NP3.2@25.729,20.966
NetL0_U1_4NP4_2: L0_U1_4NP4.2 L1_U1_4NP4.4 | length 5.6
  Top Layer w0.3: L1_U1_4NP4.4@28.702,1.85 28.702,2.05 30.073,3.421 30.073,4.779 31.444,6.15 L0_U1_4NP4.2@31.444,6.35
NetL0_U2_4NP1_2: L0_U2_4NP1.2 L1_U2_4NP1.4 | length 5.6
  Top Layer w0.3: L0_U2_4NP1.2@5.106,52.868 5.106,53.068 6.477,54.439 6.477,55.797 7.848,57.168 L1_U2_4NP1.4@7.848,57.368
NetL0_U2_4NP1_4: L0_U2_4NP1.4 L3_U1_4NP1.2 | length 8.5
  Top Layer w0.254: L3_U1_4NP1.2@1.954,50.129 1.954,50.329 0.508,51.775 0.508,55.626 1.533,56.651 1.533,56.895 L0_U2_4NP1.4@2.006,57.368
NetL0_U2_4NP2_2: L0_U2_4NP2.2 L1_U2_4NP2.4 | length 5.6
  Top Layer w0.3: L0_U2_4NP2.2@5.106,38.379 5.106,38.579 6.477,39.95 6.477,41.308 7.848,42.679 L1_U2_4NP2.4@7.848,42.879
NetL0_U2_4NP2_4: L0_U2_4NP2.4 L3_U1_4NP2.2 | length 9
  Top Layer w0.254: L0_U2_4NP2.4@2.006,42.879 1.533,42.406 1.533,42.173 0.508,41.148 0.508,36.449 1.275,35.682 1.985,35.682 L3_U1_4NP2.2@2.107,35.56
NetL0_U2_4NP3_2: L0_U2_4NP3.2 L1_U2_4NP3.4 | length 5.6
  Top Layer w0.3: L0_U2_4NP3.2@5.233,23.785 5.233,23.985 6.604,25.356 6.604,26.714 7.975,28.085 L1_U2_4NP3.4@7.975,28.285
NetL0_U2_4NP3_4: L0_U2_4NP3.4 L3_U1_4NP3.2 | length 9
  Top Layer w0.254: L3_U1_4NP3.2@2.107,20.966 2.107,21.166 1.739,21.534 1.326,21.534 0.635,22.225 0.635,27.051 1.321,27.737 1.66,27.737 2.133,28.21 L0_U2_4NP3.4@2.133,28.285
NetL0_U2_4NP4_2: L0_U2_4NP4.2 L1_U2_4NP4.4 | length 5.6
  Top Layer w0.3: L1_U2_4NP4.4@5.285,1.941 5.285,2.141 6.656,3.512 6.656,4.87 8.027,6.241 L0_U2_4NP4.2@8.027,6.441
NetL0_U2_4NP4_4: L0_U2_4NP4.4 L3_U1_4NP4.2 | length 5.7
  Top Layer w0.254: L0_U2_4NP4.4@11.127,1.941 11.127,2.141 12.468,3.482 12.468,5.229 13.335,6.096 13.602,6.096 L3_U1_4NP4.2@13.892,6.386
NetL0_U3_4NP1_2: L0_U3_4NP1.2 L1_U3_4NP1.4 | length 5.6
  Top Layer w0.3: L0_U3_4NP1.2@28.728,52.868 28.728,53.068 30.099,54.439 30.099,55.797 31.47,57.168 L1_U3_4NP1.4@31.47,57.368
NetL0_U3_4NP1_4: L0_U3_4NP1.4 L3_U2_4NP1.2 | length 6
  Top Layer w0.3: L3_U2_4NP1.2@22.658,52.832 22.658,53.032 23.108,53.482 23.308,53.482 24.13,54.304 24.13,55.87 24.978,56.718 25.178,56.718 25.628,57.168 L0_U3_4NP1.4@25.628,57.368
NetL0_U3_4NP2_2: L0_U3_4NP2.2@28.728,38.379 L1_U3_4NP2.4@31.47,42.879 | length 5.6
  Top Layer w0.3: L0_U3_4NP2.2@28.728,38.379 28.728,38.579 30.099,39.95 30.099,41.308 31.47,42.679 L1_U3_4NP2.4@31.47,42.879
NetL0_U3_4NP2_4: L0_U3_4NP2.4@25.628,42.879 L3_U2_4NP2.2 | length 6
  Top Layer w0.3: L3_U2_4NP2.2@22.658,38.343 22.658,38.543 23.108,38.993 23.308,38.993 24.13,39.815 24.13,41.381 24.978,42.229 25.178,42.229 25.628,42.679 L0_U3_4NP2.4@25.628,42.879
NetL0_U3_4NP3_2: L0_U3_4NP3.2 L1_U3_4NP3.4 | length 5.6
  Top Layer w0.3: L0_U3_4NP3.2@28.728,23.785 28.728,23.985 30.099,25.356 30.099,26.714 31.47,28.085 L1_U3_4NP3.4@31.47,28.285
NetL0_U3_4NP3_4: L0_U3_4NP3.4 L3_U2_4NP3.2 | length 5.8
  Top Layer w0.254: L3_U2_4NP3.2@22.692,23.783 23.258,24.349 23.258,24.549 24.13,25.421 24.13,26.787 24.955,27.612 25.155,27.612 25.628,28.085 L0_U3_4NP3.4@25.628,28.285
NetL0_U3_4NP4_2: L0_U3_4NP4.2 L1_U3_4NP4.4 | length 5.4
  Top Layer w0.3: L0_U3_4NP4.2@17.044,9.38 18.53,10.866 18.53,12.224 19.786,13.48 L1_U3_4NP4.4@19.786,13.68
NetL0_U3_4NP4_4: L0_U3_4NP4.4 L3_U2_4NP4.2 | length 5.6
  Top Layer w0.254: L3_U2_4NP4.2@10.998,9.168 11.522,9.692 11.522,9.892 12.446,10.816 12.446,12.044 13.806,13.404 L0_U3_4NP4.4@13.806,13.604
NetL1_U0_4NP1_2: L1_U0_4NP1.2 L2_U0_4NP1.4 | length 5.6
  Top Layer w0.3: L2_U0_4NP1.4@34.57,45.629 34.57,45.829 35.954,47.213 35.954,48.509 37.338,49.893 L1_U0_4NP1.2@37.338,50.093
NetL1_U0_4NP2_2: L1_U0_4NP2.2 L2_U0_4NP2.4 | length 5.6
  Top Layer w0.3: L2_U0_4NP2.4@34.544,31.06 34.544,31.26 35.928,32.644 35.928,33.94 37.312,35.324 L1_U0_4NP2.2@37.312,35.524
NetL1_U0_4NP3_2: L1_U0_4NP3.2 L2_U0_4NP3.4 | length 5.6
  Top Layer w0.3: L2_U0_4NP3.4@34.671,16.466 34.671,16.666 36.055,18.05 36.055,19.346 37.439,20.73 L1_U0_4NP3.2@37.439,20.93
NetL1_U1_4NP1_2: L1_U1_4NP1.2 L2_U1_4NP1.4 | length 5.6
  Top Layer w0.3: L2_U1_4NP1.4@10.896,45.629 10.896,45.829 12.28,47.213 12.28,48.509 13.664,49.893 L1_U1_4NP1.2@13.664,50.093
NetL1_U1_4NP2_2: L1_U1_4NP2.2 L2_U1_4NP2.4 | length 5.6
  Top Layer w0.3: L2_U1_4NP2.4@11.049,31.06 11.049,31.26 12.433,32.644 12.433,33.94 13.817,35.324 L1_U1_4NP2.2@13.817,35.524
NetL1_U1_4NP3_2: L1_U1_4NP3.2 L2_U1_4NP3.4 | length 5.6
  Top Layer w0.3: L2_U1_4NP3.4@11.049,16.466 11.049,16.666 12.433,18.05 12.433,19.346 13.817,20.73 L1_U1_4NP3.2@13.817,20.93
NetL1_U1_4NP4_2: L1_U1_4NP4.2 L2_U1_4NP4.4 | length 5.6
  Top Layer w0.3: L2_U1_4NP4.4@22.834,1.886 22.834,2.086 24.218,3.47 24.218,4.766 25.602,6.15 L1_U1_4NP4.2@25.602,6.35
NetL1_U2_4NP1_2: L1_U2_4NP1.2 L2_U2_4NP1.4 | length 5.6
  Top Layer w0.3: L1_U2_4NP1.2@10.948,52.868 10.948,53.068 12.332,54.452 12.332,55.748 13.716,57.132 L2_U2_4NP1.4@13.716,57.332
NetL1_U2_4NP2_2: L1_U2_4NP2.2 L2_U2_4NP2.4 | length 5.6
  Top Layer w0.3: L1_U2_4NP2.2@10.948,38.379 10.948,38.579 12.332,39.963 12.332,41.259 13.716,42.643 L2_U2_4NP2.4@13.716,42.843
NetL1_U2_4NP3_2: L1_U2_4NP3.2 L2_U2_4NP3.4 | length 5.6
  Top Layer w0.3: L1_U2_4NP3.2@11.075,23.785 11.075,23.985 12.459,25.369 12.459,26.665 13.843,28.049 L2_U2_4NP3.4@13.843,28.249
NetL1_U2_4NP4_2: L1_U2_4NP4.2 L2_U2_4NP4.4 | length 9
  Top Layer w0.254: L2_U2_4NP4.4@2.166,13.703 2.166,13.503 1.634,12.971 1.434,12.971 0.635,12.172 0.635,7.366 1.353,6.648 1.978,6.648 L1_U2_4NP4.2@2.185,6.441
NetL1_U3_4NP1_2: L1_U3_4NP1.2 L2_U3_4NP1.4 | length 5.6
  Top Layer w0.3: L1_U3_4NP1.2@34.57,52.868 34.57,53.068 35.954,54.452 35.954,55.748 37.338,57.132 L2_U3_4NP1.4@37.338,57.332
NetL1_U3_4NP2_2: L1_U3_4NP2.2@34.57,38.379 L2_U3_4NP2.4@37.338,42.843 | length 5.6
  Top Layer w0.3: L1_U3_4NP2.2@34.57,38.379 34.57,38.579 35.954,39.963 35.954,41.259 37.338,42.643 L2_U3_4NP2.4@37.338,42.843
NetL1_U3_4NP3_2: L1_U3_4NP3.2 L2_U3_4NP3.4 | length 5.6
  Top Layer w0.3: L1_U3_4NP3.2@34.57,23.785 34.57,23.985 35.954,25.369 35.954,26.665 37.338,28.049 L2_U3_4NP3.4@37.338,28.249
NetL1_U3_4NP4_2: L1_U3_4NP4.2 L2_U3_4NP4.4 | length 5.6
  Top Layer w0.3: L1_U3_4NP4.2@22.886,9.18 22.886,9.38 24.27,10.764 24.27,12.06 25.654,13.444 L2_U3_4NP4.4@25.654,13.644
NetL2_U0_4NP1_2: L2_U0_4NP1.2 L3_U0_4NP1.4 | length 5.6
  Top Layer w0.3: L3_U0_4NP1.4@28.728,45.629 28.728,45.829 30.099,47.2 30.099,48.558 31.47,49.929 L2_U0_4NP1.2@31.47,50.129
NetL2_U0_4NP2_2: L2_U0_4NP2.2 L3_U0_4NP2.4 | length 5.6
  Top Layer w0.3: L3_U0_4NP2.4@28.702,31.06 28.702,31.26 30.073,32.631 30.073,33.989 31.444,35.36 L2_U0_4NP2.2@31.444,35.56
NetL2_U0_4NP3_2: L2_U0_4NP3.2 L3_U0_4NP3.4 | length 5.6
  Top Layer w0.3: L3_U0_4NP3.4@28.829,16.466 28.829,16.666 30.2,18.037 30.2,19.395 31.571,20.766 L2_U0_4NP3.2@31.571,20.966
NetL2_U1_4NP1_2: L2_U1_4NP1.2 L3_U1_4NP1.4 | length 5.6
  Top Layer w0.3: L3_U1_4NP1.4@5.054,45.629 5.054,45.829 6.425,47.2 6.425,48.558 7.796,49.929 L2_U1_4NP1.2@7.796,50.129
NetL2_U1_4NP2_2: L2_U1_4NP2.2 L3_U1_4NP2.4 | length 5.6
  Top Layer w0.3: L3_U1_4NP2.4@5.207,31.06 5.207,31.26 6.578,32.631 6.578,33.989 7.949,35.36 L2_U1_4NP2.2@7.949,35.56
NetL2_U1_4NP3_2: L2_U1_4NP3.2 L3_U1_4NP3.4 | length 5.6
  Top Layer w0.3: L3_U1_4NP3.4@5.207,16.466 5.207,16.666 6.578,18.037 6.578,19.395 7.949,20.766 L2_U1_4NP3.2@7.949,20.966
NetL2_U1_4NP4_2: L2_U1_4NP4.2 L3_U1_4NP4.4 | length 5.6
  Top Layer w0.3: L3_U1_4NP4.4@16.992,1.886 16.992,2.086 18.363,3.457 18.363,4.815 19.734,6.186 L2_U1_4NP4.2@19.734,6.386
NetL2_U2_4NP1_2: L2_U2_4NP1.2 L3_U2_4NP1.4 | length 5.6
  Top Layer w0.3: L2_U2_4NP1.2@16.816,52.832 16.816,53.032 18.187,54.403 18.187,55.761 19.558,57.132 L3_U2_4NP1.4@19.558,57.332
NetL2_U2_4NP2_2: L2_U2_4NP2.2 L3_U2_4NP2.4 | length 5.6
  Top Layer w0.3: L2_U2_4NP2.2@16.816,38.343 16.816,38.543 18.187,39.914 18.187,41.272 19.558,42.643 L3_U2_4NP2.4@19.558,42.843
NetL2_U2_4NP3_2: L2_U2_4NP3.2 L3_U2_4NP3.4 | length 5.6
  Top Layer w0.3: L2_U2_4NP3.2@16.943,23.749 16.943,23.949 18.314,25.32 18.314,26.678 19.685,28.049 L3_U2_4NP3.4@19.685,28.249
NetL2_U2_4NP4_2: L2_U2_4NP4.2 L3_U2_4NP4.4 | length 5.6
  Top Layer w0.3: L2_U2_4NP4.2@5.207,9.144 5.207,9.344 6.578,10.715 6.578,12.073 7.949,13.444 L3_U2_4NP4.4@7.949,13.644
NetL2_U3_4NP1_2: L2_U3_4NP1.2 L3_U3_4NP1.4 | length 5.6
  Top Layer w0.3: L2_U3_4NP1.2@40.438,52.832 40.438,53.032 41.809,54.403 41.809,55.761 43.18,57.132 L3_U3_4NP1.4@43.18,57.332
NetL2_U3_4NP2_2: L2_U3_4NP2.2@40.438,38.343 L3_U3_4NP2.4@43.18,42.843 | length 5.6
  Top Layer w0.3: L2_U3_4NP2.2@40.438,38.343 40.438,38.543 41.809,39.914 41.809,41.272 43.18,42.643 L3_U3_4NP2.4@43.18,42.843
NetL2_U3_4NP3_2: L2_U3_4NP3.2 L3_U3_4NP3.4 | length 5.6
  Top Layer w0.3: L2_U3_4NP3.2@40.438,23.749 40.438,23.949 41.809,25.32 41.809,26.678 43.18,28.049 L3_U3_4NP3.4@43.18,28.249
NetL2_U3_4NP4_2: L2_U3_4NP4.2 L3_U3_4NP4.4 | length 5.6
  Top Layer w0.3: L2_U3_4NP4.2@28.754,9.144 28.754,9.344 30.125,10.715 30.125,12.073 31.496,13.444 L3_U3_4NP4.4@31.496,13.644
NetL3_U3_4NP2_2: L3_U3_4NP2.2@46.635,1.814
pads on no net: H0.4 H0.5 L0_U3_4NP2.2@40.539,9.18 L0_U3_4NP2.4@37.439,13.68 L1_U3_4NP2.2@46.508,9.18 L1_U3_4NP2.4@43.408,13.68 L2_U3_4NP2.2@40.539,1.814 L2_U3_4NP2.4@37.439,6.314 L3_U3_4NP1.2 L3_U3_4NP2.4@43.535,6.314

## Polygon pours and split planes (outlines as drawn)
GND on Bottom Layer "NONET_L01_P-001" (solid, pour order 141): 45.25,31.759 45.758,32.267 47.275,32.226 47.663,31.838 47.663,23.202 47.208,22.747 45.756,22.719 45.25,23.128
GND on Bottom Layer "NONET_L01_P-001" (solid, pour order 140): 45.339,46.276 45.847,46.784 47.364,46.743 47.752,46.355 47.752,37.719 47.297,37.264 45.845,37.236 45.339,37.645
GND on Bottom Layer "NONET_L01_P-001" (solid, pour order 138): 0.254,55.88 0.381,56.007 1.143,56.007 1.143,52.07 2.286,50.927 3.048,50.927 3.048,49.149 0.254,49.149
GND on Bottom Layer "NONET_L01_P-001" (solid, pour order 139): 0.381,41.218 0.508,41.345 1.27,41.345 1.27,37.408 2.413,36.265 3.175,36.265 3.175,34.487 0.381,34.487
GND on Bottom Layer "NONET_L01_P-001" (solid, pour order 137): 0.117,26.915 0.244,27.042 1.006,27.042 1.006,23.105 2.149,21.962 2.911,21.962 2.911,20.184 0.117,20.184
GND on Bottom Layer "NONET_L01_P-001" (solid, pour order 136): 0.127,12.383 0.254,12.509 1.016,12.509 1.016,8.572 2.159,7.429 2.921,7.429 2.921,5.524 0.127,5.524
GND on Bottom Layer "NONET_L01_P-001" (solid, pour order 135): 27.94,55.827 27.94,52.324 28.364,51.9 29.22,51.9 29.718,52.398 29.718,53.266 30.734,54.282 30.734,55.806
GND on Bottom Layer "NONET_L01_P-001" (solid, pour order 134): 32.512,47.306 32.512,50.628 32.004,51.136 31.07,51.136 30.734,50.8 30.734,49.612 29.718,48.596 29.718,47.326
GND on Bottom Layer "NONET_L01_P-001" (solid, pour order 133): 33.782,55.773 33.782,52.324 34.163,51.943 35.052,51.943 35.56,52.451 35.56,53.467 36.576,54.483 36.576,55.753
GND on Bottom Layer "NONET_L01_P-001" (solid, pour order 132): 38.308,47.224 38.308,50.547 37.8,51.055 36.911,51.055 36.53,50.674 36.53,49.531 35.514,48.515 35.514,47.245
GND on Bottom Layer "NONET_L01_P-001" (solid, pour order 131): 39.623,55.729 39.623,52.325 40.05,51.898 40.915,51.898 41.401,52.384 41.401,53.168 42.417,54.184 42.417,55.708
GND on Bottom Layer "NONET_L01_P-001" (solid, pour order 130): 44.166,47.325 44.166,50.648 43.658,51.156 42.896,51.156 42.388,50.648 42.388,49.632 41.372,48.616 41.372,47.346
GND on Bottom Layer "NONET_L01_P-001" (solid, pour order 129): 3.937,55.775 3.937,52.451 4.445,51.943 5.588,51.943 5.969,52.324 5.969,53.213 6.985,54.229 6.985,55.753
GND on Bottom Layer "NONET_L01_P-001" (solid, pour order 128): 8.769,47.371 8.769,50.921 8.488,51.202 7.26,51.202 6.884,50.826 6.884,49.678 5.868,48.662 5.868,47.392
GND on Bottom Layer "NONET_L01_P-001" (solid, pour order 127): 10.033,55.647 10.033,52.451 10.668,51.816 11.43,51.816 11.938,52.324 11.938,53.34 12.954,54.356 12.954,55.626
GND on Bottom Layer "NONET_L01_P-001" (solid, pour order 126): 14.732,47.334 14.732,50.658 14.224,51.166 13.193,51.166 12.827,50.8 12.827,49.642 11.811,48.626 11.811,47.356
GND on Bottom Layer "NONET_L01_P-001" (solid, pour order 125): 16.002,55.646 16.002,52.197 16.383,51.816 17.272,51.816 17.78,52.324 17.78,53.086 18.796,54.102 18.796,55.626
GND on Bottom Layer "NONET_L01_P-001" (solid, pour order 124): 20.453,47.224 20.453,50.547 19.945,51.055 19.056,51.055 18.675,50.674 18.675,49.531 17.659,48.515 17.659,47.245
GND on Bottom Layer "NONET_L01_P-001" (solid, pour order 123): 21.717,55.647 21.717,52.324 22.225,51.816 23.114,51.816 23.622,52.324 23.622,53.34 24.638,54.356 24.638,55.626
GND on Bottom Layer "NONET_L01_P-001" (solid, pour order 122): 26.614,47.388 26.614,50.711 26.106,51.219 25.344,51.219 24.836,50.711 24.836,49.695 23.82,48.679 23.82,47.409
GND on Bottom Layer "NONET_L01_P-001" (solid, pour order 121): 27.813,41.349 27.813,37.94 28.331,37.422 29.093,37.422 29.591,37.92 29.591,38.788 30.607,39.804 30.607,41.328
GND on Bottom Layer "NONET_L01_P-001" (solid, pour order 120): 32.248,32.894 32.248,36.217 31.74,36.725 30.978,36.725 30.47,36.217 30.47,35.201 29.454,34.185 29.454,32.915
GND on Bottom Layer "NONET_L01_P-001" (solid, pour order 119): 33.655,41.295 33.655,37.973 34.163,37.465 34.925,37.465 35.433,37.973 35.433,38.989 36.449,40.005 36.449,41.275
GND on Bottom Layer "NONET_L01_P-001" (solid, pour order 118): 38.09,32.767 38.09,36.09 37.582,36.598 36.693,36.598 36.312,36.217 36.312,35.074 35.296,34.058 35.296,32.788
GND on Bottom Layer "NONET_L01_P-001" (solid, pour order 117): 39.492,41.233 39.492,37.91 40,37.402 40.785,37.402 41.27,37.887 41.27,38.672 42.286,39.688 42.286,41.212
GND on Bottom Layer "NONET_L01_P-001" (solid, pour order 116): 43.892,32.858 43.892,36.18 43.384,36.688 42.622,36.688 42.114,36.18 42.114,35.164 41.098,34.148 41.098,32.878
GND on Bottom Layer "NONET_L01_P-001" (solid, pour order 115): 4.191,41.168 4.191,37.846 4.699,37.338 5.461,37.338 5.969,37.846 5.969,38.608 6.985,39.624 6.985,41.148
GND on Bottom Layer "NONET_L01_P-001" (solid, pour order 114): 8.714,32.771 8.714,36.086 8.197,36.603 7.338,36.603 6.83,36.095 6.83,35.079 5.814,34.063 5.814,32.793
GND on Bottom Layer "NONET_L01_P-001" (solid, pour order 113): 9.906,41.168 9.906,37.846 10.414,37.338 11.176,37.338 11.684,37.846 11.684,38.862 12.7,39.878 12.7,41.148
GND on Bottom Layer "NONET_L01_P-001" (solid, pour order 112): 14.468,33.02 14.468,36.344 13.96,36.852 13.071,36.852 12.563,36.344 12.563,35.328 11.547,34.312 11.547,33.042
GND on Bottom Layer "NONET_L01_P-001" (solid, pour order 111): 15.865,41.063 15.865,37.741 16.373,37.233 17.135,37.233 17.643,37.741 17.643,38.503 18.659,39.519 18.659,41.043
GND on Bottom Layer "NONET_L01_P-001" (solid, pour order 110): 20.31,32.894 20.31,36.217 19.802,36.725 18.913,36.725 18.532,36.344 18.532,35.201 17.516,34.185 17.516,32.915
GND on Bottom Layer "NONET_L01_P-001" (solid, pour order 109): 21.58,41.191 21.58,37.868 22.088,37.36 22.977,37.36 23.485,37.868 23.485,38.884 24.501,39.9 24.501,41.17
GND on Bottom Layer "NONET_L01_P-001" (solid, pour order 108): 26.484,33.192 26.484,36.515 25.976,37.023 25.214,37.023 24.706,36.515 24.706,35.499 23.69,34.483 23.69,33.213
GND on Bottom Layer "NONET_L01_P-001" (solid, pour order 107): 27.803,26.66 27.803,23.251 28.321,22.733 29.083,22.733 29.581,23.231 29.581,24.1 30.597,25.116 30.597,26.64
GND on Bottom Layer "NONET_L01_P-001" (solid, pour order 106): 32.512,18.141 32.512,21.463 32.004,21.971 31.242,21.971 30.734,21.463 30.734,20.447 29.718,19.431 29.718,18.161
GND on Bottom Layer "NONET_L01_P-001" (solid, pour order 105): 33.655,26.563 33.655,23.241 34.163,22.733 34.925,22.733 35.433,23.241 35.433,24.257 36.449,25.273 36.449,26.543
GND on Bottom Layer "NONET_L01_P-001" (solid, pour order 104): 38.354,18.014 38.354,21.336 37.846,21.844 36.957,21.844 36.576,21.463 36.576,20.32 35.56,19.304 35.56,18.034
GND on Bottom Layer "NONET_L01_P-001" (solid, pour order 101): 39.497,26.586 39.497,23.264 40.005,22.756 40.79,22.756 41.275,23.241 41.275,24.026 42.291,25.042 42.291,26.566
GND on Bottom Layer "NONET_L01_P-001" (solid, pour order 100): 44.156,18.104 44.156,21.426 43.648,21.934 42.886,21.934 42.378,21.426 42.378,20.41 41.362,19.394 41.362,18.124
GND on Bottom Layer "NONET_L01_P-001" (solid, pour order 99): 4.328,26.394 4.328,23.072 4.836,22.564 5.598,22.564 6.106,23.072 6.106,23.834 7.122,24.85 7.122,26.374
GND on Bottom Layer "NONET_L01_P-001" (solid, pour order 98): 8.89,18.149 8.89,21.463 8.373,21.98 7.513,21.98 7.005,21.472 7.005,20.456 5.989,19.44 5.989,18.17
GND on Bottom Layer "NONET_L01_P-001" (solid, pour order 97): 10.16,26.385 10.16,23.063 10.668,22.555 11.43,22.555 11.938,23.063 11.938,24.079 12.954,25.095 12.954,26.365
GND on Bottom Layer "NONET_L01_P-001" (solid, pour order 96): 14.732,18.267 14.732,21.59 14.224,22.098 13.335,22.098 12.827,21.59 12.827,20.574 11.811,19.558 11.811,18.288
GND on Bottom Layer "NONET_L01_P-001" (solid, pour order 95): 16.129,26.309 16.129,22.987 16.637,22.479 17.399,22.479 17.907,22.987 17.907,23.749 18.923,24.765 18.923,26.289
GND on Bottom Layer "NONET_L01_P-001" (solid, pour order 94): 20.574,18.141 20.574,21.463 20.066,21.971 19.177,21.971 18.796,21.59 18.796,20.447 17.78,19.431 17.78,18.161
GND on Bottom Layer "NONET_L01_P-001" (solid, pour order 91): 21.844,26.437 21.844,23.114 22.352,22.606 23.241,22.606 23.749,23.114 23.749,24.13 24.765,25.146 24.765,26.416
GND on Bottom Layer "NONET_L01_P-001" (solid, pour order 89): 26.66,18.443 26.66,21.765 26.152,22.273 25.39,22.273 24.882,21.765 24.882,20.749 23.866,19.733 23.866,18.463
GND on Bottom Layer "NONET_L01_P-001" (solid, pour order 88): 32.216,3.509 32.216,6.831 31.708,7.339 30.946,7.339 30.438,6.831 30.438,5.815 29.422,4.799 29.422,3.529
GND on Bottom Layer "NONET_L01_P-001" (solid, pour order 87): 27.813,11.958 27.813,8.636 28.321,8.128 29.083,8.128 29.591,8.636 29.591,9.652 30.607,10.668 30.607,11.938
GND on Bottom Layer "NONET_L01_P-001" (solid, pour order 86): 26.57,3.671 26.57,6.993 26.062,7.501 25.3,7.501 24.792,6.993 24.792,6.231 23.776,5.215 23.776,3.691
GND on Bottom Layer "NONET_L01_P-001" (solid, pour order 85): 21.957,11.823 21.957,8.501 22.465,7.993 23.227,7.993 23.735,8.501 23.735,9.517 24.751,10.533 24.751,11.803
GND on Bottom Layer "NONET_L01_P-001" (solid, pour order 84): 20.701,3.81 20.701,7.132 20.193,7.64 19.431,7.64 18.923,7.132 18.923,6.116 17.907,5.1 17.907,3.83
GND on Bottom Layer "NONET_L01_P-001" (solid, pour order 83): 16.129,11.831 16.129,8.509 16.637,8.001 17.399,8.001 17.907,8.509 17.907,9.525 18.923,10.541 18.923,11.811
GND on Bottom Layer "NONET_L01_P-001" (solid, pour order 82): 14.759,3.671 14.759,6.993 14.251,7.501 13.489,7.501 12.981,6.993 12.981,6.231 11.965,5.215 11.965,3.691
GND on Bottom Layer "NONET_L01_P-001" (solid, pour order 81): 10.146,11.823 10.146,8.501 10.654,7.993 11.416,7.993 11.924,8.501 11.924,9.517 12.94,10.533 12.94,11.803
GND on Bottom Layer "NONET_L01_P-001" (solid, pour order 80): 8.89,3.81 8.89,7.132 8.382,7.64 7.62,7.64 7.112,7.132 7.112,6.116 6.096,5.1 6.096,3.83
GND on Bottom Layer "NONET_L01_P-001" (solid, pour order 79): 4.318,11.958 4.318,8.636 4.826,8.128 5.588,8.128 6.096,8.636 6.096,9.652 7.112,10.668 7.112,11.938
GND on Bottom Layer "base_gnd" (solid, pour order 143): -0.251,0.872 -0.251,57.895 -0.208,57.991 cw(c0.765,57.768) 0.824,58.765 0.892,58.785 49.406,58.785 49.483,58.759 cw(c49.47,57.451) 50.77,57.601 50.804,57.514 50.804,0.872 50.778,0.796 cw(c49.47,0.809) 49.401,-0.498 49.279,-0.525 1.146,-0.525 1.065,-0.496 cw(c1.146,0.872)
+5 on Bottom Layer "Bottom Layer-+5" (solid, pour order 142): 0.986,11.747 1.008,4.254 50.883,4.254 50.894,4.268 50.766,52.231 47.688,55.308 41.651,55.308 41.651,55.118 0.996,55.118 1.018,47.625 45.7,47.625 45.734,40.64 0.996,40.64 1.018,33.147 46.714,33.147 46.748,26.416 0.996,26.416 1.018,18.923 46.205,18.923 46.241,11.747
+5 on Top Layer "NONET_L01_P-001" (solid, pour order 77): 37.084,10.795 37.084,8.382 44.831,8.382 44.831,11.43 44.704,11.43 37.973,11.43
GND on Top Layer "NONET_L01_P-001" (solid, pour order 78): -0.127,1.27 -0.127,58.293 -0.084,58.388 cw(c0.889,58.166) 0.948,59.163 1.016,59.182 49.53,59.182 49.606,59.157 cw(c49.593,57.848) 50.893,57.999 50.927,57.912 50.927,1.27 50.902,1.194 cw(c49.593,1.206) 49.525,-0.1 49.403,-0.127 1.27,-0.127 1.189,-0.098 cw(c1.27,1.27)

## Keep-outs
Keep-Out Layer:
  lines w0.2: 0,1.27 ccw(c1.27,1.27) 1.27,0 ; 0,58.293 cw(c0.889,58.166) 1.016,59.055 ; 49.53,0 ccw(c49.593,1.206) 50.8,1.27 ; 49.53,59.055 cw(c49.593,57.848) 50.8,57.912
  lines w0.254: 0,1.27 0,58.293 ; 1.016,59.055 2.159,59.055 14.002,59.055 37.687,59.055 49.53,59.055 ; 1.27,0 49.403,0 ; 50.8,1.27 50.8,57.912 ; 0,58.293 0,58.293 ; 0,58.293 0,58.293

## Silkscreen, mask and mechanical layers (free items; w line width, h text height)
Top Overlay:
  text "MIL - Small NeoPixel Matrix - ENF" at 49.649,15.456 h1 r90